# EAGLE board PowerStage (EAGLE 6.5.0)

Size 100.1 x 79.9 mm. Coordinates in mm from the lower left corner, seen from the top.
Outline: 0.1,0 100.1,0 100,79.9 0,79.9
Copper layers (1*16): Top 0.035mm / dielectric 1.5mm / Bottom 0.035mm
Design rules "default": minimum track width 10mil, minimum drill 24mil, track to track 8mil, track to pad 8mil, pad to pad 8mil, via to via 8mil, smd to smd 8mil, copper to edge 40mil, drill to drill 8mil, minimum pad ring 10mil, minimum via ring 8mil, stop-mask expansion 4mil, vias tented up to drill 0mil, thermal gap 10mil

## Footprints (pad centres in the part's own frame; a part is rotated, then mirrored left to right if it is on the bottom)
1210 = smd 1.2 x 2: 1 -1.6,0; 2 1.6,0
0805 = smd 0.8 x 1.2: 1 -0.9,0; 2 0.9,0
C2220K = smd 1.85 x 5.5: 1 -2.55,0; 2 2.55,0
SMA-DIODE-B240A = smd 1.7 x 2.5: A 0,0; C 4,0
DRB8_1P75X1P5 = smd 0.838 x 0.356: 1 -1.473,0.965; 2 -1.473,0.33; 3 -1.473,-0.33; 4 -1.473,-0.965; 5 1.473,-0.965; 6 1.473,-0.33; 7 1.473,0.33; 8 1.473,0.965 | smd 1.499 x 1.753: 9 0,0 | drill 0.254: V 0,-0.406; V_2 0,0.406
DRC10_2P4X1P65 = smd 0.838 x 0.279: 1 -1.473,0.991; 2 -1.473,0.508; 3 -1.473,0; 4 -1.473,-0.508; 5 -1.473,-0.991; 6 1.473,-0.991; 7 1.473,-0.508; 8 1.473,0; 9 1.473,0.508; 10 1.473,0.991 | smd 1.65 x 2.4: P$1 0,0 | smd 0.28 x 0.7: P$2 -0.39,1.54; P$3 0.39,1.54; P$4 -0.39,-1.54; P$5 0.39,-1.54
SDE06A = smd 0.61 x 0.356: 1 -1.397,0.94; 2 -1.397,0; 3 -1.397,-0.94; 4 1.397,-0.94; 5 1.397,0; 6 1.397,0.94 | smd 1.6 x 2.108: 7 0,0
SLF12555 = smd 2.6 x 3.2: P$1 -5.55,0; P$2 5.55,0

## Placement (x,y rotation side)
C1  4.7uF  [1210]  14.48,17.31 90 top
C2  .01uF  [0805]  15.49,12.91 270 top
C3  .1uF  [0805]  16.76,17.78 90 top
C4  5600pF  [0805]  25.18,15.48 90 top
C5  270pF  [0805]  23.63,15.5 90 top
C6  47uF\  [C2220K]  22.38,26.45 270 top
C7  1uF  [0805]  14.91,23.99 270 top
C8  1uF  [0805]  9.14,25.75 90 top
C9  1uF  [0805]  9.49,20.99 90 top
D1  DIODE-SCHOTTKY240A  [SMA-DIODE-B240A]  20.28,20.31 0 top
R1  348k  [0805]  11.44,15.88 90 top
R2  88.7k  [0805]  11.44,13.02 90 top
R3  237k  [0805]  17.04,12.91 90 top
R4  7.68k  [0805]  24.39,13.51 180 top
R5  59k  [0805]  27.4,12.79 0 top
R6  10k  [0805]  21.14,12.84 0 top
U1  TPS73733-Q1_DRB_8  [DRB8_1P75X1P5]  12.04,21.59 90 top
U2  TPS54240_DRC_10  [DRC10_2P4X1P65]  19.81,15.85 0 top
U3  LP38692_NGG_6  [SDE06A]  12.03,26.25 270 top
U$1  SLF12555T  [SLF12555]  31.84,23.52 90 top

## Library data of the parts
C1-C9 D1 R1-R6 U$1 = SwitcherPowerStage
U1 = SwitcherPowerStage; DATASHEETURL: http://www.ti.com/lit/gpn/TPS73733-Q1; DESCRIPTION: Automotive Catalog Automotive Catalog Single Output LDO, 1A, Fixed (3.3V), Reverse Current Protect; FAMILY_NAME: SINGLE CHANNEL LDO; GENERIC_PART_NUMBER: TPS73733-Q1; INDUSTRY_STD_PKG_TYPE: SON; MANUFACTURER: Texas Instruments; MANUFACTURER_PART_NUMBER: tps73733-q1_drb_8; PACKAGE_DESIGNATOR: DRB; PIN_COUNT: 8; VENDOR: Texas Instruments
U2 = SwitcherPowerStage; DATASHEETURL: http://www.ti.com/lit/gpn/TPS54240; DESCRIPTION: 3.5V to 42V Input, 2.5A Step-Down Converter with Eco-Mode; FAMILY_NAME: STEP-DOWN REGULATOR; GENERIC_PART_NUMBER: TPS54240; INDUSTRY_STD_PKG_TYPE: SON; MANUFACTURER: Texas Instruments; MANUFACTURER_PART_NUMBER: tps54240_drc_10; PACKAGE_DESIGNATOR: DRC; PIN_COUNT: 10; VENDOR: Texas Instruments
U3 = SwitcherPowerStage; BASE_PN: LP38692; COMP: TypeLDO; LIBRARY: ReferenceLP38692SD; PARTNUMBER: LP38692SD-18; PIN: Count6; SYMBOL: NameLP38692SD-18; TYPE: LP38692SD-1.8; VENDOR: NationalSemiconductor; VERSION: 1

## Nets
GND: C1.2 C2.2 C4.2 C5.2 C6.2 C7.2 C8.2 C9.2 D1.A R2.1 R3.1 R6.1 U1.4 U1.9 U2.9 U2.P$1 U2.P$2 U2.P$3 U2.P$4 U2.P$5 U3.2 U3.7
N$1: R1.1 R2.2 U2.3
N$2: C2.1 U2.4
N$3: R3.2 U2.5
N$4: C3.1 U2.1
N$5: C3.2 D1.C U2.10 U$1.P$1
N$6: C5.1 R4.2 U2.8
N$7: C4.1 R4.1
N$9: R5.1 R6.2 U2.7
PVDD: C1.1 R1.2 U2.2
VCC3V3: C9.1 U1.1
VCC5V0: C8.1 U1.5 U1.8 U3.4 U3.5
VCC5V5: C6.1 C7.1 R5.2 U3.1 U3.3 U3.6 U$1.P$2

## Tracks (layer width: path | path; a pad name or v marks a point on that pad's centre or on a via)
GND  (21 unrouted)
N$1  (2 unrouted)
N$2  (1 unrouted)
N$3  (1 unrouted)
N$4  (1 unrouted)
N$5  (3 unrouted)
N$6  (2 unrouted)
N$7  (1 unrouted)
N$9  (2 unrouted)
PVDD  (2 unrouted)
VCC3V3  (1 unrouted)
VCC5V0  (4 unrouted)
VCC5V5  (6 unrouted)